# Altium PCB Axis Driver PCB.PcbDoc (part 1 of 2)
Units mil, origin at the board's own origin, x right, y up, seen from the top; angles counter-clockwise.
Board outline 7230 x 2255 mil, 2 copper layers (Top Layer, Bottom Layer); 120 components, 90 nets, 456 pads, 132 vias.
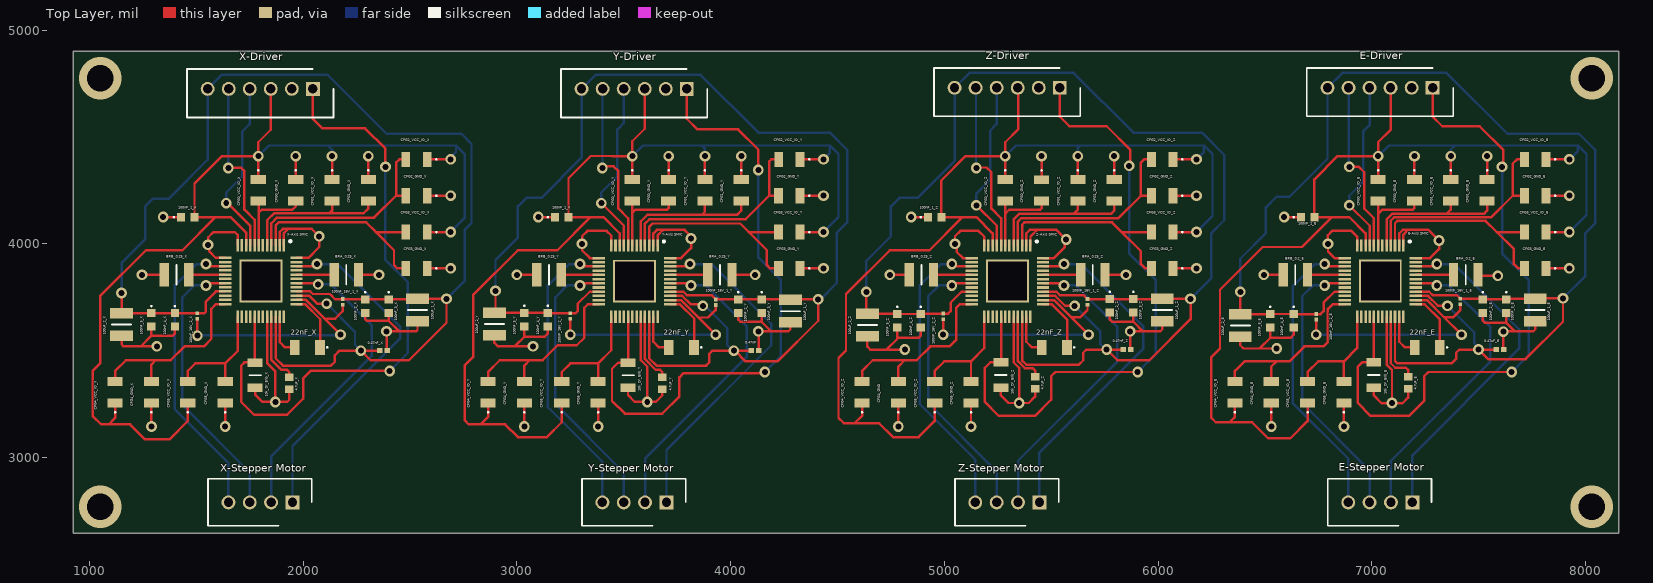
[diagram p0: Top Layer view]
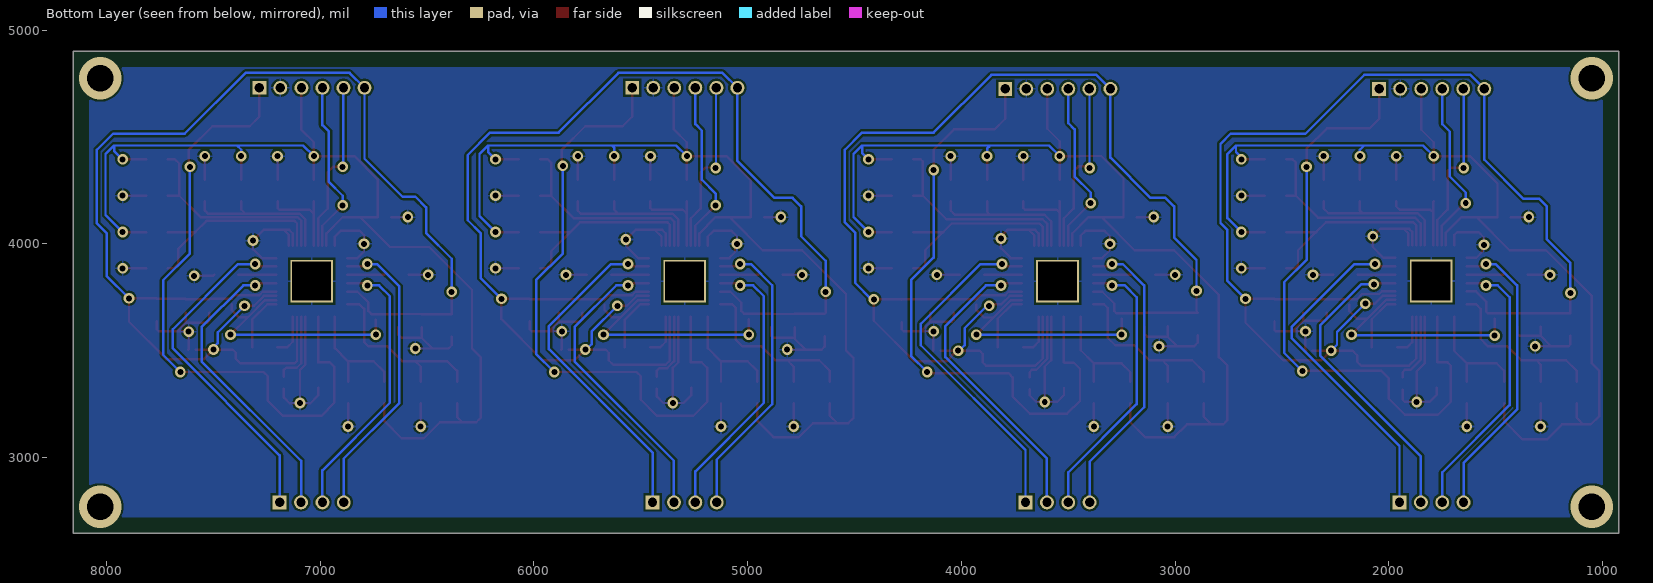
[diagram p1: Bottom Layer view, seen from below]
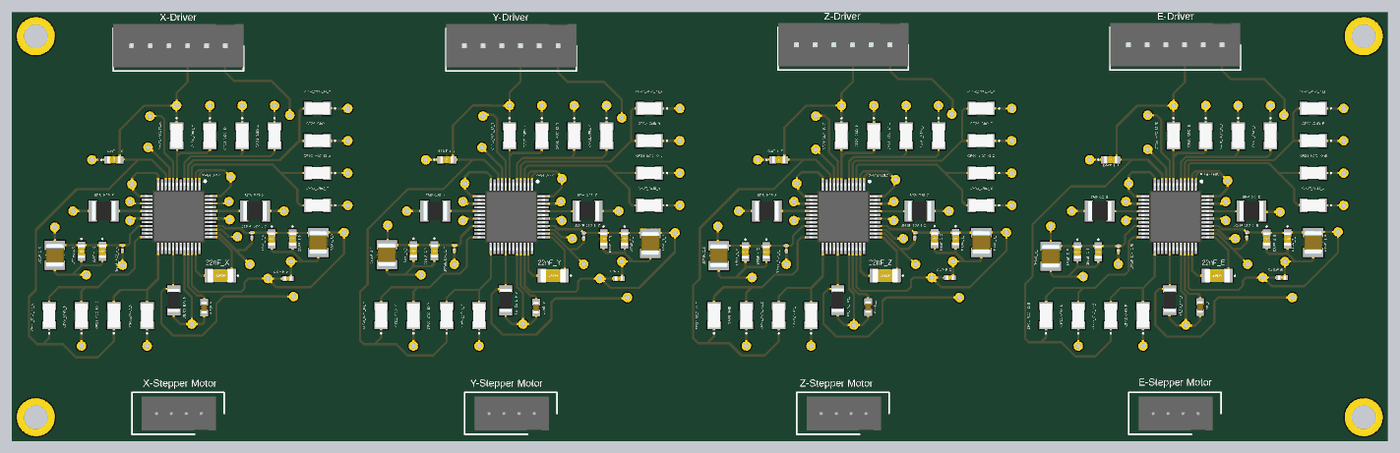
[diagram p3: 3D render of the assembled board from above, using the file's embedded part models]

## Layer stack, top to bottom
Top Solder: solder mask 0.4, Solder Resist, Dk 3.5
Top Layer: signal copper 1.4
Dielectric 1: dielectric 12.6, FR-4, Dk 4.8
Bottom Layer: signal copper 1.4
Bottom Solder: solder mask 0.4, Solder Resist, Dk 3.5

## Board outline
925,4900 8155,4900 8155,2645 925,2645

## Design rules (kind name [scope] priority, off if disabled: settings)
Clearance Clearance_1 [InNamedPolygon('GND_L02_P000')] p1: gap=10 ignorepadtopadclearanceinfootprint=FALSE
Clearance [All] p2: gap=5 ignorepadtopadclearanceinfootprint=FALSE
HoleSize [All] p1: absolutevalues=TRUE maxlimit=200 minlimit=1 maxpercent=80.000 minpercent=20.000
HoleToHoleClearance [All] p1: gap=1 allowstackedmicrovias=TRUE
MinimumSolderMaskSliver [All] p1: minsoldermaskwidth=0.5
PolygonConnect [All] p1: connectstyle=Relief reliefconductorwidth=10 reliefentries=4 polygonreliefangle="90 Angle" airgapwidth=10
RoutingVias [All] p1: holewidth=28 width=50 viastyle="Through Hole" minholewidth=28 minwidth=50 maxholewidth=200 maxwidth=200
SilkToSilkClearance [All] p1: silktosilkclearance=0.1
SilkToSolderMaskClearance [IsPad] p1: minsilkscreentomaskgap=1 clearancetoexposedcopper=TRUE
SolderMaskExpansion [All] p1: expansion=7 istentingtop=FALSE
Width [All] p1: maxlimit=100 minlimit=10 preferedwidth=11.5
25 further rules are at their usual default settings.

## Classes and differential pairs
component class "U_Z-Axis Stepper Motor Driver": 0.47nF_Z 4.7uF_Z 10k_Dr_Enb_Z 22nF_Z 100nF_1_Z 100nF_2_Z 100nF_3_Z 100nF_4_Z 100nF_5_Z 100nF_16V_1_Z 100nF_16V_2_Z 100uF_1_Z 100uF_2_Z BRA_0.25_Z BRB_0.25_Z CFG0_GND_Z CFG0_VCC_IO_Z CFG1_GND_Z CFG1_VCC_IO_Z CFG2_GND_Z CFG2_VCC_IO_Z CFG3_GND_Z CFG3_VCC_IO_Z CFG4_GND CFG4_VCC_IO_Z CFG5_GND_Z CFG5_VCC_IO_Z "Z-Axis SMIC"
component class "U_X_Axis Stepper Motor Driver": 0.47nF_X 4.7uF_X 10k_Dr_Enb_X 22nF_X 100nF_1_X 100nF_2_X 100nF_3_X 100nF_4_X 100nF_5_X 100nF_16V_1_X 100nF_16V_2_X 100uF_1_X 100uF_2_X BRA_0.25_X BRB_0.25_X CFG0_GND_X CFG0_VCC_IO_X CFG1_GND_X CFG1_VCC_IO_X CFG2_GND_X CFG2_VCC_IO_X CFG3_GND_X CFG3_VCC_IO_X CFG4_GND_X CFG4_VCC_IO_X CFG5_GND_X CFG5_VCC_IO_X "X-Axis SMIC"
component class "U_Extruder Stepper Motor Driver": 0.47uF_E 4.7uF_E 10k_Dr_Enb_E 22nF_E 100nF_1_E 100nF_2_E 100nF_3_E 100nF_4_E 100nF_5_E 100nF_16V_1_E 100nF_16V_2_E 100uF_1_E 100uF_2_E BRA_0.2_E BRB_0.2_E CFG0_GND_E CFG0_VCC_IO_E CFG1_GND_E CFG1_VCC_IO_E CFG2_GND_E CFG2_VCC_IO_E CFG3_GND_E CFG3_VCC_IO_E CFG4_GND_E CFG4_VCC_IO_E CFG5_GND_E CFG5_VCC_IO_E "E-Axis SMIC"
component class "Stepper Motor Driver Board": E-Driver E-Driver? "E-Stepper Motor" X-Driver "X-Stepper Motor" "X-Stepper Motor?" Y-Driver "Y-Stepper Motor" Z-Driver "Z-Stepper Motor"
component class "U_Y_Stepper Motor Driver": 0.47nF 4.7uF_Y 10k_Dr_Enb_Y 22nF_Y 100nF_1_Y 100nF_2_Y 100nF_3_Y 100nF_4_Y 100nF_5_Y 100nF_16V_1_Y 100nF_16V_2_Y 100uF_1_Y 100uF_2_Y BRA_0.25_Y BRA_GND BRB_0.25_Y BRB_GND CFG0_GND_Y CFG0_VCC_IO_Y CFG1_GND_Y CFG1_VCC_IO_Y CFG2_GND_Y CFG2_VCC_IO_Y CFG3_GND_Y CFG3_VCC_IO_Y CFG4_GND_Y CFG4_VCC_IO_Y CFG5_GND_Y CFG5_VCC_IO_Y "Y-Axis SMIC"

## Components (designator, comment, footprint, x,y, rotation, side; value= is the part's Value field where it differs from the comment)
0.47nF "C0402C474K9RACTU" CAPC1005X55N 4115,3500 r0 top
0.47nF_X "C0402C474K9RACTU" CAPC1005X55N 2375,3500 r0 top
0.47nF_Z "C0402C474K9RACTU" CAPC1005X55N 5855,3505 r0 top
0.47uF_E "C0402C474K9RACTU" CAPC1005X55N 7600,3505 r0 top
4.7uF_E "GCJ188C70J475KE02D" CAPC1608X100N 7170,3350 r90 top
4.7uF_X "GCJ188C70J475KE02D" CAPC1608X100N 1935,3347.05 r90 top
4.7uF_Y "GCJ188C70J475KE02D" CAPC1608X100N 3680,3347.05 r90 top
4.7uF_Z "GCJ188C70J475KE02D" CAPC1608X100N 5425,3350 r90 top
10k_Dr_Enb_E "RC1206FR-7W10KL" RESC3116X65N 7010,3385.94 r90 top
10k_Dr_Enb_X "RC1206FR-7W10KL" RESC3116X65N 1775,3385 r90 top
10k_Dr_Enb_Y "RC1206FR-7W10KL" RESC3116X65N 3520,3385 r90 top
10k_Dr_Enb_Z "RC1206FR-7W10KL" RESC3116X65N 5265,3385.94 r90 top
22nF_E "C1206C223KMRECTU" C1206 7260,3515 r180 top
22nF_X "C1206C223KMRECTU" C1206 2020,3515 r180 top
22nF_Y "C1206C223KMRECTU" C1206 3770,3515 r180 top
22nF_Z "C1206C223KMRECTU" C1206 5515,3515 r180 top
100nF_1_E "C0603C104K9RACTU" C0603 6700,4125 r0 top
100nF_1_X "C0603C104K9RACTU" C0603 1460,4125 r0 top
100nF_1_Y "C0603C104K9RACTU" C0603 3210,4125 r0 top
100nF_1_Z "C0603C104K9RACTU" C0603 4955,4125 r0 top
100nF_2_E "C0603C104K9RACTU" C0603 7520,3708.5 r270 top
100nF_2_X "C0603C104K9RACTU" C0603 2290,3708.5 r270 top
100nF_2_Y "C0603C104K9RACTU" C0603 4145,3708.5 r270 top
100nF_2_Z "C0603C104K9RACTU" C0603 5775,3710 r270 top
100nF_3_E "C0603C104K9RACTU" C0603 7630,3708.5 r270 top
100nF_3_X "C0603C104K9RACTU" C0603 2400,3708.5 r270 top
100nF_3_Y "C0603C104K9RACTU" C0603 4035,3708.5 r270 top
100nF_3_Z "C0603C104K9RACTU" C0603 5885,3710 r270 top
100nF_4_E "C0603C104K9RACTU" C0603 6635,3640 r270 top
100nF_4_X "C0603C104K9RACTU" C0603 1400,3643.5 r270 top
100nF_4_Y "C0603C104K9RACTU" C0603 3145,3645 r270 top
100nF_4_Z "C0603C104K9RACTU" C0603 4890,3640 r270 top
100nF_5_E "C0603C104K9RACTU" C0603 6525,3640 r270 top
100nF_5_X "C0603C104K9RACTU" C0603 1290,3643.5 r270 top
100nF_5_Y "C0603C104K9RACTU" C0603 3035,3645 r270 top
100nF_5_Z "C0603C104K9RACTU" C0603 4780,3640 r270 top
100nF_16V_1_E "GRM033R61C104KE14D" CAPC0603X33N 7415,3730 r270 top
100nF_16V_1_X "GRM033R61C104KE14D" CAPC0603X33N 2185,3727.99 r270 top
100nF_16V_1_Y "GRM033R61C104KE14D" CAPC0603X33N 3930,3727.01 r270 top
100nF_16V_1_Z "GRM033R61C104KE14D" CAPC0603X33N 5670,3727.99 r270 top
100nF_16V_2_E "GRM033R61C104KE14D" CAPC0603X33N 6740,3657.99 r270 top
100nF_16V_2_X "GRM033R61C104KE14D" CAPC0603X33N 1505,3662.01 r270 top
100nF_16V_2_Y "GRM033R61C104KE14D" CAPC0603X33N 3250,3662.01 r270 top
100nF_16V_2_Z "GRM033R61C104KE14D" CAPC0603X33N 4995,3660 r270 top
100uF_1_E "GRM32EC80G107KE20L" CAPC3225X270N 7765,3690 r270 top
100uF_1_X "GRM32EC80G107KE20L" CAPC3225X270N 2535,3690 r270 top
100uF_1_Y "GRM32EC80G107KE20L" CAPC3225X270N 4280,3685 r270 top
100uF_1_Z "GRM32EC80G107KE20L" CAPC3225X270N 6020,3690 r270 top
100uF_2_E "GRM32EC80G107KE20L" CAPC3225X270N 6385,3617.64 r270 top
100uF_2_X "GRM32EC80G107KE20L" CAPC3225X270N 1150,3622.64 r270 top
100uF_2_Y "GRM32EC80G107KE20L" CAPC3225X270N 2895,3625 r270 top
100uF_2_Z "GRM32EC80G107KE20L" CAPC3225X270N 4640,3620 r270 top
BRA_0.2_E "RL1210FR-070R25L" RESC3126X65N 7440,3855 r0 top
BRA_0.25_X "RL1210FR-070R25L" RESC3126X65N 2202.09,3855 r0 top
BRA_0.25_Y "RL1210FR-070R25L" RESC3126X65N 3950,3855 r0 top
BRA_0.25_Z "RL1210FR-070R25L" RESC3126X65N 5695,3855 r0 top
BRB_0.2_E "RL1210FR-070R25L" RESC3126X65N 6642.91,3855 r180 top
BRB_0.25_X "RL1210FR-070R25L" RESC3126X65N 1407.09,3855 r180 top
BRB_0.25_Y "RL1210FR-070R25L" RESC3126X65N 3150,3855 r180 top
BRB_0.25_Z "RL1210FR-070R25L" RESC3126X65N 4892.91,3855 r180 top
CFG0_GND_E "RCC120647K0FKEA" RCC1206_e3 7200,4250 r270 top
CFG0_GND_X "RCC120647K0FKEA" RCC1206_e3 1965,4250 r270 top
CFG0_GND_Y "RCC120647K0FKEA" RCC1206_e3 3710,4250 r270 top
CFG0_GND_Z "RCC120647K0FKEA" RCC1206_e3 5455,4249.8 r270 top
CFG0_VCC_IO_E "RCC120647K0FKEA" RCC1206_e3 7030,4250.2 r270 top
CFG0_VCC_IO_X "RCC120647K0FKEA" RCC1206_e3 1790,4250 r270 top
CFG0_VCC_IO_Y "RCC120647K0FKEA" RCC1206_e3 3540,4250 r270 top
CFG0_VCC_IO_Z "RCC120647K0FKEA" RCC1206_e3 5285,4250 r270 top
CFG1_GND_E "RCC120647K0FKEA" RCC1206_e3 7540,4250 r270 top
CFG1_GND_X "RCC120647K0FKEA" RCC1206_e3 2305,4250 r270 top
CFG1_GND_Y "RCC120647K0FKEA" RCC1206_e3 4050,4250 r270 top
CFG1_GND_Z "RCC120647K0FKEA" RCC1206_e3 5795,4250 r270 top
CFG1_VCC_IO_E "RCC120647K0FKEA" RCC1206_e3 7370,4250 r270 top
CFG1_VCC_IO_X "RCC120647K0FKEA" RCC1206_e3 2135,4250 r270 top
CFG1_VCC_IO_Y "RCC120647K0FKEA" RCC1206_e3 3880,4250 r270 top
CFG1_VCC_IO_Z "RCC120647K0FKEA" RCC1206_e3 5625,4250 r270 top
CFG2_GND_E "RCC120647K0FKEA" RCC1206_e3 7765,4225 r180 top
CFG2_GND_X "RCC120647K0FKEA" RCC1206_e3 2530,4225 r180 top
CFG2_GND_Y "RCC120647K0FKEA" RCC1206_e3 4275,4225 r180 top
CFG2_GND_Z "RCC120647K0FKEA" RCC1206_e3 6020,4225 r180 top
CFG2_VCC_IO_E "RCC120647K0FKEA" RCC1206_e3 7765,4395 r180 top
CFG2_VCC_IO_X "RCC120647K0FKEA" RCC1206_e3 2530,4395 r180 top
CFG2_VCC_IO_Y "RCC120647K0FKEA" RCC1206_e3 4275.2,4395 r180 top
CFG2_VCC_IO_Z "RCC120647K0FKEA" RCC1206_e3 6020,4395 r180 top
CFG3_GND_E "RCC120647K0FKEA" RCC1206_e3 7765,3885 r180 top
CFG3_GND_X "RCC120647K0FKEA" RCC1206_e3 2530,3885 r180 top
CFG3_GND_Y "RCC120647K0FKEA" RCC1206_e3 4275,3885 r180 top
CFG3_GND_Z "RCC120647K0FKEA" RCC1206_e3 6020,3885 r180 top
CFG3_VCC_IO_E "RCC120647K0FKEA" RCC1206_e3 7765,4055 r180 top
CFG3_VCC_IO_X "RCC120647K0FKEA" RCC1206_e3 2530,4055 r180 top
CFG3_VCC_IO_Y "RCC120647K0FKEA" RCC1206_e3 4275,4055 r180 top
CFG3_VCC_IO_Z "RCC120647K0FKEA" RCC1206_e3 6020,4055 r180 top
CFG4_GND "RCC120647K0FKEA" RCC1206_e3 4785,3305 r90 top
CFG4_GND_E "RCC120647K0FKEA" RCC1206_e3 6530,3305 r90 top
CFG4_GND_X "RCC120647K0FKEA" RCC1206_e3 1290,3305 r90 top
CFG4_GND_Y "RCC120647K0FKEA" RCC1206_e3 3035,3305 r90 top
CFG4_VCC_IO_E "RCC120647K0FKEA" RCC1206_e3 6360,3305 r90 top
CFG4_VCC_IO_X "RCC120647K0FKEA" RCC1206_e3 1120,3304.8 r90 top
CFG4_VCC_IO_Y "RCC120647K0FKEA" RCC1206_e3 2865,3305.2 r90 top
CFG4_VCC_IO_Z "RCC120647K0FKEA" RCC1206_e3 4615,3305 r90 top
CFG5_GND_E "RCC120647K0FKEA" RCC1206_e3 6870,3305 r90 top
CFG5_GND_X "RCC120647K0FKEA" RCC1206_e3 1635,3305 r90 top
CFG5_GND_Y "RCC120647K0FKEA" RCC1206_e3 3380,3305 r90 top
CFG5_GND_Z "RCC120647K0FKEA" RCC1206_e3 5125,3305 r90 top
CFG5_VCC_IO_E "RCC120647K0FKEA" RCC1206_e3 6700,3305 r90 top
CFG5_VCC_IO_X "RCC120647K0FKEA" RCC1206_e3 1460,3305 r90 top
CFG5_VCC_IO_Y "RCC120647K0FKEA" RCC1206_e3 3210,3305 r90 top
CFG5_VCC_IO_Z "RCC120647K0FKEA" RCC1206_e3 4955,3305 r90 top
"E-Axis SMIC" "TMC2130-TA-T" QFP50P900X900X120-49N#1 7040,3825 r270 top
E-Driver "B6B-XH-A_LF__SN_" SHDR6W64P0X250_1X6_1740X575X700P 7285.28,4730 r180 top
"E-Stepper Motor" "B4B-PH-K-S_LF__SN_" SHDR4W50P0X200_1X4_990X450X600P 7125,2790 r0 top
"X-Axis SMIC" "TMC2130-TA-T" QFP50P900X900X120-49N#1 1801.85,3826.1 r270 top
X-Driver "B6B-XH-A_LF__SN_" SHDR6W64P0X250_1X6_1740X575X700P 2045.28,4725 r180 top
"X-Stepper Motor" "B4B-PH-K-S_LF__SN_" SHDR4W50P0X200_1X4_990X450X600P 1885,2790 r0 top
"Y-Axis SMIC" "TMC2130-TA-T" QFP50P900X900X120-49N#2 3550,3825 r270 top
Y-Driver "B6B-XH-A_LF__SN_" SHDR6W64P0X250_1X6_1740X575X700P 3795,4725 r180 top
"Y-Stepper Motor" "B4B-PH-K-S_LF__SN_" SHDR4W50P0X200_1X4_990X450X600P 3635,2790 r0 top
"Z-Axis SMIC" "TMC2130-TA-T" QFP50P900X900X120-49N#1 5295,3825 r270 top
Z-Driver "B6B-XH-A_LF__SN_" SHDR6W64P0X250_1X6_1740X575X700P 5540.28,4730 r180 top
"Z-Stepper Motor" "B4B-PH-K-S_LF__SN_" SHDR4W50P0X200_1X4_990X450X600P 5380,2790 r0 top

## Footprints (in the part's own frame and the unit in brackets; to place one, negate y for a bottom-side part, rotate by r counter-clockwise, add the part's x,y. Pads: shape width x height; smd on the part's side, far side on the other; paste and mask are expansions set on the pad)
C0603 [mm]
  rect 0.95x1 smd: 1(-0.8,0) 2(0.8,0)
  silkscreen extent -1.7,-0.05 -1.6,0.05, body extent -0.87,-0.48 0.88,0.47, height 0.87
C1206 [mm]
  rect 1.15x1.8 smd: 1(-1.5,0) 2(1.5,0)
  silkscreen extent -2.4,-0.05 -2.3,0.05, body extent -1.7,-0.9 1.7,0.9, height 1.75
CAPC0603X33N [mm]
  rect 0.46x0.42 smd: 1(-0.33,0) 2(0.33,0)
  body extent -0.3,-0.15 0.3,0.15, height 0.33
CAPC1005X55N [mm]
  rect 0.65x0.62 smd: 1(-0.44,0) 2(0.44,0)
  body extent -0.52,-0.28 0.53,0.27, height 0.55
CAPC1608X100N [mm]
  rect 0.9x1.02 smd: 1(-0.71,0) 2(0.71,0)
  body extent -0.8,-0.4 0.8,0.4, height 1
CAPC3225X270N [mm]
  rect 1.26x2.72 smd: 1(-1.33,0) 2(1.33,0)
  silkscreen extent 0,-1.15 0,1.15, body extent -1.6,-1.25 1.6,1.25, height 2.7
QFP50P900X900X120-49N#1 [mm]
  rect 1.475x0.3 smd: 1(-4.238,2.75) 2(-4.238,2.25) 3(-4.238,1.75) 4(-4.238,1.25) 5(-4.238,0.75) 6(-4.238,0.25) 7(-4.238,-0.25) 8(-4.238,-0.75) 9(-4.238,-1.25) 10(-4.238,-1.75) 11(-4.238,-2.25) 12(-4.238,-2.75) 25(4.238,-2.75) 26(4.238,-2.25) 27(4.238,-1.75) 28(4.238,-1.25) 29(4.238,-0.75) 30(4.238,-0.25) 31(4.238,0.25) 32(4.238,0.75) 33(4.238,1.25) 34(4.238,1.75) 35(4.238,2.25) 36(4.238,2.75)
  rect 0.3x1.475 smd: 13(-2.75,-4.238) 14(-2.25,-4.238) 15(-1.75,-4.238) 16(-1.25,-4.238) 17(-0.75,-4.238) 18(-0.25,-4.238) 19(0.25,-4.238) 20(0.75,-4.238) 21(1.25,-4.238) 22(1.75,-4.238) 23(2.25,-4.238) 24(2.75,-4.238) 37(2.75,4.238) 38(2.25,4.238) 39(1.75,4.238) 40(1.25,4.238) 41(0.75,4.238) 42(0.25,4.238) 43(-0.25,4.238) 44(-0.75,4.238) 45(-1.25,4.238) 46(-1.75,4.238) 47(-2.25,4.238) 48(-2.75,4.238)
  rect 5.1x5.1 smd: 49(0,0)
  silkscreen extent -4.85,3.38 -4.6,3.63, body extent -4.5,-4.5 4.5,4.5, height 1.2
QFP50P900X900X120-49N#2 [mm]
  rect 1.475x0.3 smd: 1(-4.238,2.75) 2(-4.238,2.25) 3(-4.238,1.75) 4(-4.238,1.25) 5(-4.238,0.75) 6(-4.238,0.25) 7(-4.238,-0.25) 8(-4.238,-0.75) 9(-4.238,-1.25) 10(-4.238,-1.75) 11(-4.238,-2.25) 12(-4.238,-2.75) 25(4.238,-2.75) 26(4.238,-2.25) 27(4.238,-1.75) 28(4.238,-1.25) 29(4.238,-0.75) 30(4.238,-0.25) 31(4.238,0.25) 32(4.238,0.75) 33(4.238,1.25) 34(4.238,1.75) 35(4.238,2.25) 36(4.238,2.75)
  rect 0.3x1.475 smd: 13(-2.75,-4.238) 14(-2.25,-4.238) 15(-1.75,-4.238) 16(-1.25,-4.238) 17(-0.75,-4.238) 18(-0.25,-4.238) 19(0.25,-4.238) 20(0.75,-4.238) 21(1.25,-4.238) 22(1.75,-4.238) 23(2.25,-4.238) 24(2.75,-4.238) 37(2.75,4.238) 38(2.25,4.238) 39(1.75,4.238) 40(1.25,4.238) 41(0.75,4.238) 42(0.25,4.238) 43(-0.25,4.238) 44(-0.75,4.238) 45(-1.25,4.238) 46(-1.75,4.238) 47(-2.25,4.238) 48(-2.75,4.238)
  rect 5.08x5.08 smd: 49(0,0)
  silkscreen extent -4.85,3.38 -4.6,3.63, body extent -4.5,-4.5 4.5,4.5, height 1.2
RCC1206_e3 [mm]
  rect 1.05x1.8 smd: 1(-1.275,0) 2(1.275,0)
  silkscreen extent -2.42,-0.05 -2.33,0.05, body extent -1.6,-0.8 1.6,0.8, height 0.55
RESC3116X65N [mm]
  rect 1x1.75 smd: 1(-1.5,0) 2(1.5,0)
  silkscreen extent 0,-0.7 0,0.7, body extent -1.55,-0.8 1.55,0.8, height 0.65
RESC3126X65N [mm]
  rect 1.1x2.8 smd: 1(-1.45,0) 2(1.45,0)
  silkscreen extent 0,-1.2 0,1.2, body extent -1.55,-1.3 1.55,1.3, height 0.65
SHDR4W50P0X200_1X4_990X450X600P [mm]
  rect 1.65x1.65 hole 1.1: 1(1.651,0)
  round 1.65 hole 1.1: 2(-0.889,0) 3(-3.429,0) 4(-5.969,0)
  silkscreen extent -8.38,-2.79 3.94,2.8, body extent -7.06,-2.25 2.84,2.25, height 6
SHDR6W64P0X250_1X6_1740X575X700P [mm]
  rect 1.65x1.65 hole 1.1: 1(0,0)
  round 1.65 hole 1.1: 2(2.5,0) 3(5,0) 4(7.5,0) 5(10,0) 6(12.5,0)
  silkscreen extent -2.45,-2.35 14.95,3.4, body extent -2.45,-2.88 14.95,2.88, height 7

## Part data
0.47nF 0.47nF_X 0.47nF_Z 0.47uF_E: "Capacitor", Manufacturer_Name=KEMET, Mouser Part Number=80-C0402C474K9RACTU, Datasheet Link=https://content.kemet.com/datasheets/KEM_C1002_X7R_SMD.pdf, Height=0.55mm, Manufacturer_Part_Number=C0402C474K9RACTU, Mouser Price/Stock=https://www.mouser.co.uk/ProductDetail/KEMET/C0402C474K9RACTU?qs=iLbezkQI%252BshEQvJDr%2FWmpQ%3D%3D
4.7uF_E 4.7uF_X 4.7uF_Y 4.7uF_Z: "Capacitor", Manufacturer_Name="Murata Electronics", Mouser Part Number=81-GCJ188C70J475KE2D, Arrow Part Number=GCJ188C70J475KE02D, Arrow Price/Stock=https://www.arrow.com/en/products/gcj188c70j475ke02d/murata-manufacturing?region=nac, Datasheet Link=https://psearch.en.murata.com/capacitor/product/GCJ188C70J475KE02%23.html, Height=1mm, Manufacturer_Part_Number=GCJ188C70J475KE02D, Mouser Price/Stock=https://www.mouser.co.uk/ProductDetail/Murata-Electronics/GCJ188C70J475KE02D?qs=QzBtWTOodeVfJR8CElrI4A%3D%3D
10k_Dr_Enb_E 10k_Dr_Enb_X 10k_Dr_Enb_Y 10k_Dr_Enb_Z: "Resistor", Manufacturer_Name=KEMET, Arrow Part Number=RC1206FR-7W10KL, Arrow Price/Stock=https://www.arrow.com/en/products/rc1206fr-7w10kl/yageo, Datasheet Link=https://datasheet.datasheetarchive.com/originals/distributors/Datasheets_SAMA/902f9e387b938f871d31120f5fc1d65e.pdf, Height=0.65mm, Manufacturer_Part_Number=RC1206FR-7W10KL
22nF_E 22nF_X 22nF_Y 22nF_Z: "Capacitor", Manufacturer_Name=KEMET, Mouser Part Number=80-C1206C223KMRECTU, Datasheet Link=https://content.kemet.com/datasheets/KEM_C1090_X7R_ESD.pdf, Manufacturer_Part_Number=C1206C223KMRECTU, Mouser Price/Stock=https://www.mouser.co.uk/ProductDetail/KEMET/C1206C223KMRECTU?qs=55YtniHzbhA1XbH3T1d9uw%3D%3D
100nF_1_E 100nF_1_X 100nF_1_Y 100nF_1_Z 100nF_2_E 100nF_2_X 100nF_2_Y 100nF_2_Z 100nF_3_E 100nF_3_X 100nF_3_Y 100nF_3_Z 100nF_4_E 100nF_4_X 100nF_4_Y 100nF_4_Z 100nF_5_E 100nF_5_X 100nF_5_Y 100nF_5_Z: "Capacitor", Manufacturer_Name=KEMET, Mouser Part Number=80-C0603C104K9R, Arrow Part Number=C0603C104K9RACTU, Arrow Price/Stock=https://www.arrow.com/en/products/c0603c104k9ractu/kemet-corporation?region=nac, Datasheet Link=https://content.kemet.com/datasheets/KEM_C1002_X7R_SMD.pdf, Height=0.87mm, Manufacturer_Part_Number=C0603C104K9RACTU, Mouser Price/Stock=https://www.mouser.co.uk/ProductDetail/KEMET/C0603C104K9RACTU?qs=7q2aiX3GdliuPZzPpldOsA%3D%3D
100nF_16V_1_E 100nF_16V_1_X 100nF_16V_1_Y 100nF_16V_1_Z 100nF_16V_2_E 100nF_16V_2_X 100nF_16V_2_Y 100nF_16V_2_Z: "Capacitor", Manufacturer_Name="Murata Electronics", Mouser Part Number=81-GRM033R61C104KE4D, Arrow Part Number=GRM033R61C104KE14D, Arrow Price/Stock=https://www.arrow.com/en/products/grm033r61c104ke14d/murata-manufacturing?region=nac, Datasheet Link=https://psearch.en.murata.com/capacitor/product/GRM033R61C104KE14%23.html, Height=0.33mm, Manufacturer_Part_Number=GRM033R61C104KE14D, Mouser Price/Stock=https://www.mouser.co.uk/ProductDetail/Murata-Electronics/GRM033R61C104KE14D?qs=jHkklCh7amhDvY8zUHp0eA%3D%3D
100uF_1_E 100uF_1_X 100uF_1_Y 100uF_1_Z 100uF_2_E 100uF_2_X 100uF_2_Y 100uF_2_Z: "Capacitor", Manufacturer_Name="Murata Electronics", Mouser Part Number=81-GRM32EC80G107KE0L, Arrow Part Number=GRM32EC80G107KE20L, Arrow Price/Stock=https://www.arrow.com/en/products/grm32ec80g107ke20l/murata-manufacturing, Datasheet Link=https://datasheet.datasheetarchive.com/originals/distributors/DKDS-10/192475.pdf, Height=2.7mm, Manufacturer_Part_Number=GRM32EC80G107KE20L, Mouser Price/Stock=https://www.mouser.co.uk/ProductDetail/Murata-Electronics/GRM32EC80G107KE20L?qs=eeBpzGFlv%252B8VEtl0LRYzNQ%3D%3D
BRA_0.2_E BRA_0.25_X BRA_0.25_Y BRA_0.25_Z BRB_0.2_E BRB_0.25_X BRB_0.25_Y BRB_0.25_Z: "Resistor", Manufacturer_Name=KEMET, Mouser Part Number=603-RL1210FR-070R25L, Datasheet Link=https://www.mouser.de/datasheet/2/447/PYu-RL_Group_521_RoHS_L_2-1131815.pdf, Height=0.65mm, Manufacturer_Part_Number=RL1210FR-070R25L, Mouser Price/Stock=https://www.mouser.co.uk/ProductDetail/Yageo/RL1210FR-070R25L?qs=k2KEx2DUIRR2Lho3B1zagg%3D%3D
CFG0_GND_E CFG0_GND_X CFG0_GND_Y CFG0_GND_Z CFG0_VCC_IO_E CFG0_VCC_IO_X CFG0_VCC_IO_Y CFG0_VCC_IO_Z CFG1_GND_E CFG1_GND_X CFG1_GND_Y CFG1_GND_Z CFG1_VCC_IO_E CFG1_VCC_IO_X CFG1_VCC_IO_Y CFG1_VCC_IO_Z CFG2_GND_E CFG2_GND_X CFG2_GND_Y CFG2_GND_Z CFG2_VCC_IO_E CFG2_VCC_IO_X CFG2_VCC_IO_Y CFG2_VCC_IO_Z CFG3_GND_E CFG3_GND_X CFG3_GND_Y CFG3_GND_Z CFG3_VCC_IO_E CFG3_VCC_IO_X CFG3_VCC_IO_Y CFG3_VCC_IO_Z CFG4_GND CFG4_GND_E CFG4_GND_X CFG4_GND_Y CFG4_VCC_IO_E CFG4_VCC_IO_X CFG4_VCC_IO_Y CFG4_VCC_IO_Z CFG5_GND_E CFG5_GND_X CFG5_GND_Y CFG5_GND_Z CFG5_VCC_IO_E CFG5_VCC_IO_X CFG5_VCC_IO_Y CFG5_VCC_IO_Z: "Resistor", Manufacturer_Name=Vishay, Mouser Part Number=71-RCC120647K0FKEA, Datasheet Link=https://www.vishay.com/docs/20066/rcce3.pdf, Height=0.6mm, Manufacturer_Part_Number=RCC120647K0FKEA, Mouser Price/Stock=https://www.mouser.co.uk/ProductDetail/Vishay-Dale/RCC120647K0FKEA?qs=IS%252B4QmGtzzrgga70d3fY5w%3D%3D
"E-Axis SMIC" "X-Axis SMIC" "Y-Axis SMIC" "Z-Axis SMIC": "Integrated Circuit", Manufacturer_Name=TRINAMIC, Mouser Part Number=700-TMC2130-TA-T, Datasheet Link=https://www.trinamic.com/fileadmin/assets/Products/ICs_Documents/TMC2130_datasheet.pdf, Height=1.2mm, Manufacturer_Part_Number=TMC2130-TA-T, Mouser Price/Stock=https://www.mouser.co.uk/ProductDetail/Trinamic/TMC2130-TA-T?qs=TiOZkKH1s2SorQX5NhxZsQ%3D%3D
E-Driver X-Driver Y-Driver Z-Driver: "Connector", Arrow Part Number=B6B-XH-A(LF)(SN), Manufacturer_Name="JST (JAPAN SOLDERLESS TERMINALS)", Arrow Price/Stock=https://www.arrow.com/en/products/b6b-xh-a-lf-sn/jst-manufacturing?region=europe, Datasheet Link=https://datasheet.lcsc.com/szlcsc/JST-Sales-America-B6B-XH-A-LF-SN_C144397.pdf, Height=7mm, Manufacturer_Part_Number=B6B-XH-A(LF)(SN)
"E-Stepper Motor" "X-Stepper Motor" "Y-Stepper Motor" "Z-Stepper Motor": "Connector", Arrow Part Number=B4B-PH-K-S(LF)(SN), Manufacturer_Name="JST (JAPAN SOLDERLESS TERMINALS)", Arrow Price/Stock=https://www.arrow.com/en/products/b4b-ph-k-s-lf-sn/jst-manufacturing, Datasheet Link=https://datasheet.lcsc.com/szlcsc/JST-Sales-America-B4B-PH-K-S-LF-SN_C131334.pdf, Height=6mm, Manufacturer_Part_Number=B4B-PH-K-S(LF)(SN)

## Free pads (board coordinates)
  rect 200x200 hole 180 square: 3(1801.85,3826.1) 4(3550,3825) 5(5295,3825) 6(7040,3825)

## Via types
v1: diameter 50, hole 28, Top Layer to Bottom Layer, 128 vias
v2: diameter 200, hole 125, Top Layer to Bottom Layer, 4 vias

## Nets (pads, with @x,y where several pads share a name; then routed paths per layer and width w, separated by ;. In a path a pad name is that pad's centre, name@x,y a point inside that pad or via, vN(x,y) a via of type N, cw(c..) or ccw(c..) an arc to the next point about the centre after c; other vN are vias at no path point)
GND: 0.47nF.2 0.47nF_X.2 0.47nF_Z.2 0.47uF_E.2 4.7uF_E.1 4.7uF_X.1 4.7uF_Y.1 4.7uF_Z.1 10k_Dr_Enb_E.1 10k_Dr_Enb_X.1 10k_Dr_Enb_Y.1 10k_Dr_Enb_Z.1 100nF_1_E.1 100nF_1_X.1 100nF_1_Y.1 100nF_1_Z.1 100nF_2_E.2 100nF_2_X.2 100nF_2_Y.2 100nF_2_Z.2 100nF_3_E.2 100nF_3_X.2 100nF_3_Y.2 100nF_3_Z.2 100nF_4_E.2 100nF_4_X.2 100nF_4_Y.2 100nF_4_Z.2 100nF_5_E.2 100nF_5_X.2 100nF_5_Y.2 100nF_5_Z.2 100uF_1_E.2 100uF_1_X.2 100uF_1_Y.2 100uF_1_Z.2 100uF_2_E.2 100uF_2_X.2 100uF_2_Y.2 100uF_2_Z.2 "E-Axis SMIC.1" "E-Axis SMIC.2" "E-Axis SMIC.12" "E-Axis SMIC.13" "E-Axis SMIC.32" "E-Axis SMIC.48" "E-Axis SMIC.49" "X-Axis SMIC.1" "X-Axis SMIC.2" "X-Axis SMIC.12" "X-Axis SMIC.13" "X-Axis SMIC.32" "X-Axis SMIC.48" "X-Axis SMIC.49" "Y-Axis SMIC.1" "Y-Axis SMIC.2" "Y-Axis SMIC.12" "Y-Axis SMIC.13" "Y-Axis SMIC.32" "Y-Axis SMIC.48" "Y-Axis SMIC.49" "Z-Axis SMIC.1" "Z-Axis SMIC.2" "Z-Axis SMIC.12" "Z-Axis SMIC.13" "Z-Axis SMIC.32" "Z-Axis SMIC.48" "Z-Axis SMIC.49" BRA_0.2_E.2 BRA_0.25_X.2 BRA_0.25_Y.2 BRA_0.25_Z.2 BRB_0.2_E.2 BRB_0.25_X.2 BRB_0.25_Y.2 BRB_0.25_Z.2 CFG0_GND_E.1 CFG0_GND_X.1 CFG0_GND_Y.1 CFG0_GND_Z.1 CFG1_GND_E.1 CFG1_GND_X.1 CFG1_GND_Y.1 CFG1_GND_Z.1 CFG2_GND_E.1 CFG2_GND_X.1 CFG2_GND_Y.1 CFG2_GND_Z.1 CFG3_GND_E.1 CFG3_GND_X.1 CFG3_GND_Y.1 CFG3_GND_Z.1 CFG4_GND.1 CFG4_GND_E.1 CFG4_GND_X.1 CFG4_GND_Y.1 CFG5_GND_E.1 CFG5_GND_X.1 CFG5_GND_Y.1 CFG5_GND_Z.1 E-Driver.2 pad.3 pad.4 pad.5 pad.6 X-Driver.2 Y-Driver.2 Z-Driver.2 | length 14001.7
  Top Layer w11.5: 100uF_2_X.2@1150,3570.28 1150,3530 1160,3520 1240,3520 ; v1@1245.55,3855 BRB_0.25_X.2@1350,3855 ; v1(1290,3145) CFG4_GND_X.1@1290,3254.8 ; 100nF_5_X.2@1290,3612.01 1290,3570 ; v1(1315,3520) 1240,3520 ; v1(1345,4125) 100nF_1_X.1@1428.5,4125 ; 100nF_4_X.2@1400,3612.01 1400,3580 1390,3570 1290,3570 ; v1(1635,3145) CFG5_GND_X.1@1635,3254.8 ; 1635,3934.37 1590.63,3934.37 1560.88,3964.12 1560.88,3989.12 v1(1555,3995) 1555.51,3995.51 1555.51,4030.51 1580,4055 1680,4055 1693.58,4041.42 1693.58,3992.95 ; 10k_Dr_Enb_X.1@1775,3325.94 1775,3295.44 1810.44,3260 v1(1870,3260) ; 1831.38,3659.25 1831.38,3441.33 1870,3402.71 v1(1870,3260) ; 1890.43,3992.95 1890.43,4055.43 1905,4070 1930,4070 ; 1910.12,3992.95 1910.12,4050.12 1930,4070 ; 4.7uF_X.1@1935,3317.05 1935,3270 1925,3260 v1(1870,3260) ; CFG0_GND_X.1@1965,4300.2 v1(1965,4410) ; 1968.7,3934.37 2024.37,3934.37 2075,3985 v1(2075,4035) 2040,4070 1930,4070 ; BRA_0.25_X.2@2259.17,3855 v1(2355,3855) ; 100nF_2_X.2@2290,3677.01 2290,3646.74 2296.74,3640 2400,3640 ; CFG1_GND_X.1@2305,4300.2 v1(2305,4410) ; 0.47nF_X.2@2387.32,3500 0.47nF_X.2@2388.66,3501.34 ; 0.47nF_X.2@2392.32,3500 2391.16,3501.16 2391.16,3588.84 v1(2390,3590) 2450,3590 ; 0.47nF_X.2@2394.65,3500 0.47nF_X.2@2394.82,3500.18 ; 100nF_3_X.2@2400,3677.01 2400,3640 ; 100uF_1_X.2@2535,3637.64 2535,3596.74 2528.26,3590 2450,3590 ; CFG3_GND_X.1@2580.2,3885 v1(2690,3885) ; CFG2_GND_X.1@2580.2,4225 v1(2690,4225) ; 100uF_2_Y.2@2895,3572.64 2895,3536.74 2911.74,3520 2993.37,3520 ; v1(3000,3855) BRB_0.25_Y.2@3092.91,3855 ; v1(3035,3145) CFG4_GND_Y.1@3035,3254.8 ; 100nF_5_Y.2@3035,3613.5 3035,3565 ; v1(3075,3520) 2993.37,3520 ; v1(3100,4125) 100nF_1_Y.1@3178.5,4125 ; 100nF_4_Y.2@3145,3613.5 3145,3580 3130,3565 3035,3565 ; v1(3380,3145) CFG5_GND_Y.1@3380,3254.8 ; 3383.15,3933.27 3341.73,3933.27 3305,3970 v1(3305,4000) 3305,4035 3330,4060 3420,4060 3441.73,4038.27 3441.73,3991.85 ; 10k_Dr_Enb_Y.1@3520,3325.94 3520,3291.74 3551.74,3260 v1(3610,3260) ; 3579.53,3658.15 3579.53,3455.47 3610,3425 v1(3610,3260) ; 3638.58,3991.85 3638.58,4048.58 3655,4065 3685,4065 ; 3658.27,3991.85 3658.27,4038.27 3685,4065 ; 4.7uF_Y.1@3680,3319.09 3680,3290 3650,3260 v1(3610,3260) ; CFG0_GND_Y.1@3710,4300.2 v1(3710,4410) ; 3716.85,3933.27 3768.27,3933.27 3815,3980 v1(3815,4025) 3815,4035 3785,4065 3685,4065 ; BRA_0.25_Y.2@4007.09,3855 v1(4115,3855) ; 100nF_3_Y.2@4035,3677.01 4035,3645 4045,3635 4145,3635 ; CFG1_GND_Y.1@4050,4300.2 v1(4050,4410) ; 0.47nF.2@4132.32,3500 4131.16,3501.16 4131.16,3588.84 v1(4130,3590) 4190,3590 ; 100nF_2_Y.2@4145,3677.01 4145,3635 ; 100uF_1_Y.2@4280,3632.64 4280,3600 4270,3590 4190,3590 ; CFG3_GND_Y.1@4325.2,3885 v1(4435,3885) ; CFG2_GND_Y.1@4325.2,4225 v1(4435,4225) ; 100uF_2_Z.2@4640,3567.64 4640,3518.47 4653.47,3505 4730,3505 ; v1(4745,3855) BRB_0.25_Z.2@4835.83,3855 ; 100nF_5_Z.2@4780,3608.5 4780,3555 ; v1(4785,3145) CFG4_GND.1@4785,3254.8 ; v1(4815,3505) 4730,3505 ; v1(4845,4125) 100nF_1_Z.1@4923.5,4125 ; 100nF_4_Z.2@4890,3608.5 4890,3570 4880,3560 4785,3560 4780,3555 ; v1(5125,3145) CFG5_GND_Z.1@5125,3254.8 ; 5128.15,3933.27 5086.73,3933.27 5057.37,3962.63 5057.37,3992.63 v1(5050,4000) 5050,4035 5075,4060 5160,4060 5186.73,4033.27 5186.73,3991.85 ; 10k_Dr_Enb_Z.1@5265,3326.89 5265,3290 5300,3255 v1(5350,3255) ; 5324.53,3658.15 5324.53,3445.47 5350,3420 v1(5350,3255) ; 5383.58,3991.85 5383.58,4048.58 5400,4065 5435,4065 ; 5403.27,3991.85 5403.27,4033.27 5435,4065 ; 4.7uF_Z.1@5425,3322.05 5425,3285 5395,3255 v1(5350,3255) ; CFG0_GND_Z.1@5455,4300 v1(5455,4410) ; 5461.85,3933.27 5513.27,3933.27 5562.63,3982.63 5562.63,4012.63 v1(5570,4020) 5525,4065 5435,4065 ; BRA_0.25_Z.2@5752.09,3855 v1(5850,3855) ; 100nF_2_Z.2@5775,3678.5 5775,3645 5785,3635 5885,3635 ; CFG1_GND_Z.1@5795,4300.2 v1(5795,4410) ; 0.47nF_Z.2@5872.32,3505 5871.16,3506.16 5871.16,3588.84 v1(5870,3590) 5930,3590 ; 100nF_3_Z.2@5885,3678.5 5885,3635 ; 100uF_1_Z.2@6020,3637.64 6020,3600 6010,3590 5930,3590 ; CFG3_GND_Z.1@6070.2,3885 v1(6180,3885) ; CFG2_GND_Z.1@6070.2,4225 v1(6180,4225) ; 100uF_2_E.2@6385,3565.28 6385,3525 6400,3510 6475,3510 ; v1(6495,3855) BRB_0.2_E.2@6585.83,3855 ; 100nF_5_E.2@6525,3608.5 6525,3560 ; v1(6530,3145) CFG4_GND_E.1@6530,3254.8 ; v1(6555,3510) 6475,3510 ; v1(6590,4125) 100nF_1_E.1@6668.5,4125 ; 100nF_4_E.2@6635,3608.5 6635,3575 6620,3560 6525,3560 ; v1(6870,3145) CFG5_GND_E.1@6870,3254.8 ; 6873.15,3933.27 6826.73,3933.27 6795.51,3964.49 6795.51,3999.49 v1(6795,4000) 6795,4040 6815,4060 6905,4060 6931.73,4033.27 6931.73,3991.85 ; 10k_Dr_Enb_E.1@7010,3326.89 7010,3290 7047,3253 7093,3253 v1(7095,3255) ; 7069.53,3658.15 7069.53,3435.47 7095,3410 v1(7095,3255) ; 7128.58,3991.85 7128.58,4048.58 7145,4065 7170,4065 ; 7148.27,3991.85 7148.27,4043.27 7170,4065 ; 4.7uF_E.1@7170,3322.05 7170,3280 7143,3253 7097,3253 v1(7095,3255) ; CFG0_GND_E.1@7200,4300.2 v1(7200,4410) ; 7206.85,3933.27 7273.27,3933.27 7315,3975 v1(7315,4015) 7265,4065 7170,4065 ; BRA_0.2_E.2@7497.09,3855 7502.09,3850 v1(7590,3850) ; 100nF_2_E.2@7520,3677.01 7520,3640 7530,3630 7630,3630 ; CFG1_GND_E.1@7540,4300.2 v1(7540,4410) ; 0.47uF_E.2@7617.32,3505 7616.16,3506.16 v1(7616.16,3588.84) 7617.32,3590 7670,3590 ; 100nF_3_E.2@7630,3677.01 7630,3630 ; 100uF_1_E.2@7765,3637.64 7765,3600 7755,3590 7670,3590 ; CFG3_GND_E.1@7815.2,3885 v1(7925,3885) ; CFG2_GND_E.1@7815.2,4225 v1(7925,4225) ; 1240,3520 1290,3570 ; 2400,3640 2450,3590 ; 2993.37,3520 2993.37,3523.37 3035,3565 ; 4145,3635 4190,3590 ; 4730,3505 4780,3555 ; 5885,3635 5930,3590 ; 6475,3510 6525,3560 ; 7630,3630 7670,3590
  other v1: 1245.52,3855.03
Net0.47nF_1: 0.47nF.1 100nF_2_Y.1 100nF_3_Y.1 100nF_4_Y.1 100nF_5_Y.1 100nF_16V_1_Y.1 100nF_16V_2_Y.1 100uF_1_Y.1 100uF_2_Y.1 "Y-Axis SMIC.21" "Y-Axis SMIC.34" "Y-Axis SMIC.39" "Y-Axis SMIC.40" Y-Driver.6 | length 6475.1
  Top Layer w11.5: v1(2900,3780) 2900,3682.36 100uF_2_Y.1@2895,3677.36 3034.13,3677.36 100nF_5_Y.1@3035,3676.5 100nF_4_Y.1@3145,3676.5 3146.5,3675 100nF_16V_2_Y.1@3250,3675 3275,3675 3285,3685 3285,3720 3340.79,3775.79 3383.15,3775.79 ; 3618.9,3658.15 3618.9,3464.44 3653.33,3430 3885,3430 3900,3445 3900,3485 3915,3500 v1(4015,3500) v1@4020,3500 ; 3716.85,3756.1 3773.9,3756.1 3812.63,3717.37 3862.63,3717.37 v1(3870,3710) ; 3716.85,3775.79 3779.21,3775.79 3795,3760 3910.79,3760 3927.48,3743.31 3927.48,3742.52 100nF_16V_1_Y.1@3930,3740 100nF_3_Y.1@4035,3740 100nF_2_Y.1@4145,3740 4277.36,3740 100uF_1_Y.1@4280,3737.36 4282.64,3740 v1(4410,3740) 4410,3640 4220,3450 4070,3450 v1@4020,3500 ; 0.47nF.1@4097.68,3500 v1@4020,3500
  Bottom Layer w11.5: v1(2900,3780) 2900,3925 3005,4030 3005,4175 3045,4215 3115,4215 3302.87,4402.87 Y-Driver.6@3302.87,4725 3367.87,4790 3860,4790 4130,4520 4465,4520 4545,4440 4545,4100 4497.5,4052.5 4497.5,3817.5 4420,3740 v1(4410,3740) ; v1(3870,3710) 3880,3710 3985,3605 3985,3525 4010,3500 v1(4015,3500)
Net0.47nF_2: 
Net0.47nF_X_1: 0.47nF_X.1 100nF_2_X.1 100nF_3_X.1 100nF_4_X.1 100nF_5_X.1 100nF_16V_1_X.1 100nF_16V_2_X.1 100uF_1_X.1 100uF_2_X.1 "X-Axis SMIC.21" "X-Axis SMIC.34" "X-Axis SMIC.39" "X-Axis SMIC.40" X-Driver.6 | length 6493.3
  Top Layer w11.5: v1(1150,3770) 100uF_2_X.1@1150,3675 100nF_5_X.1@1290,3675 100nF_4_X.1@1400,3675 100nF_16V_2_X.1@1505,3675 1538.26,3675 1545,3681.74 1545,3730 1591.89,3776.89 1635,3776.89 ; 1870.75,3659.25 1870.75,3464.25 1905,3430 2130,3430 2147.5,3447.5 2147.5,3477.5 2170,3500 v1(2270,3500) ; 1968.7,3757.2 2027.8,3757.2 2065,3720 v1(2110,3720) ; 1968.7,3776.89 2033.11,3776.89 2045,3765 2125,3765 2150,3740 2184.02,3740 100nF_16V_1_X.1@2185,3740.98 2289.02,3740.98 100nF_2_X.1@2290,3740 100nF_3_X.1@2400,3740 2532.64,3740 100uF_1_X.1@2535,3742.36 2670.6,3742.36 v1(2670.7,3742.26) 2670.7,3630.7 2495,3455 2315,3455 v1(2270,3500) ; 0.47nF_X.1@2357.68,3500 v1(2270,3500)
  Bottom Layer w11.5: v1(1150,3770) 1150,3910 1260,4020 1260,4175 1295,4210 1370,4210 1553.15,4393.15 X-Driver.6@1553.15,4725 1618.15,4790 2115,4790 2390,4515 2740,4515 2787.5,4467.5 2787.5,4097.5 2755,4065 2755,3826.56 v1(2670.7,3742.26) ; v1(2110,3720) 2242.5,3587.5 2242.5,3527.5 v1(2270,3500)
Net0.47nF_X_2: 
Net0.47nF_Z_1: 0.47nF_Z.1 100nF_2_Z.1 100nF_3_Z.1 100nF_4_Z.1 100nF_5_Z.1 100nF_16V_1_Z.1 100nF_16V_2_Z.1 100uF_1_Z.1 100uF_2_Z.1 "Z-Axis SMIC.21" "Z-Axis SMIC.34" "Z-Axis SMIC.39" "Z-Axis SMIC.40" Z-Driver.6 | length 6490.1
  Top Layer w11.5: v1(4635,3775) 4635,3677.36 100uF_2_Z.1@4640,3672.36 4779.13,3672.36 100nF_5_Z.1@4780,3671.5 100nF_4_Z.1@4890,3671.5 4891.5,3672.99 100nF_16V_2_Z.1@4995,3672.99 5017.99,3672.99 5030,3685 5030,3725 5080.79,3775.79 5128.15,3775.79 ; 5363.9,3658.15 5363.9,3454.44 5383.33,3435 5630,3435 5650,3455 5650,3490 5665,3505 v1(5760,3505) ; 5461.85,3756.1 5518.9,3756.1 5565,3710 v1(5610,3710) ; 5461.85,3775.79 5524.21,3775.79 5540,3760 5650.98,3760 5666.69,3744.29 5667.48,3744.29 5670,3741.77 100nF_16V_1_Z.1@5670,3740.98 5774.49,3740.98 100nF_2_Z.1@5775,3741.5 100nF_3_Z.1@5885,3741.5 6019.13,3741.5 100uF_1_Z.1@6020,3742.36 v1(6152.36,3742.36) 6152.36,3647.36 5960,3455 5810,3455 v1(5760,3505) ; 0.47nF_Z.1@5837.68,3505 5770,3505 v1(5760,3505)
  Bottom Layer w11.5: v1(4635,3775) 4635,3920 4750,4035 4750,4175 4790,4215 4875,4215 5048.15,4388.15 Z-Driver.6@5048.15,4730 5118.15,4800 5605,4800 5885,4520 6205,4520 6310,4415 6310,4110 6250,4050 6250,3840 v1(6152.36,3742.36) ; v1(5610,3710) 5730,3590 5730,3530 5755,3505 v1(5760,3505)
Net0.47nF_Z_2: 